# Altium PCB TD.0002-101.PcbDoc
Units mm, origin at the board's own origin, x right, y up, seen from the top; angles counter-clockwise.
Board outline 50 x 50 mm, 4 copper layers (Top Layer, GND, VCC, Bottom Layer), stack 1.468 mm thick; 57 components, 44 nets, 218 pads, 281 vias.
Unrouted connection lines stored in the file: 37.
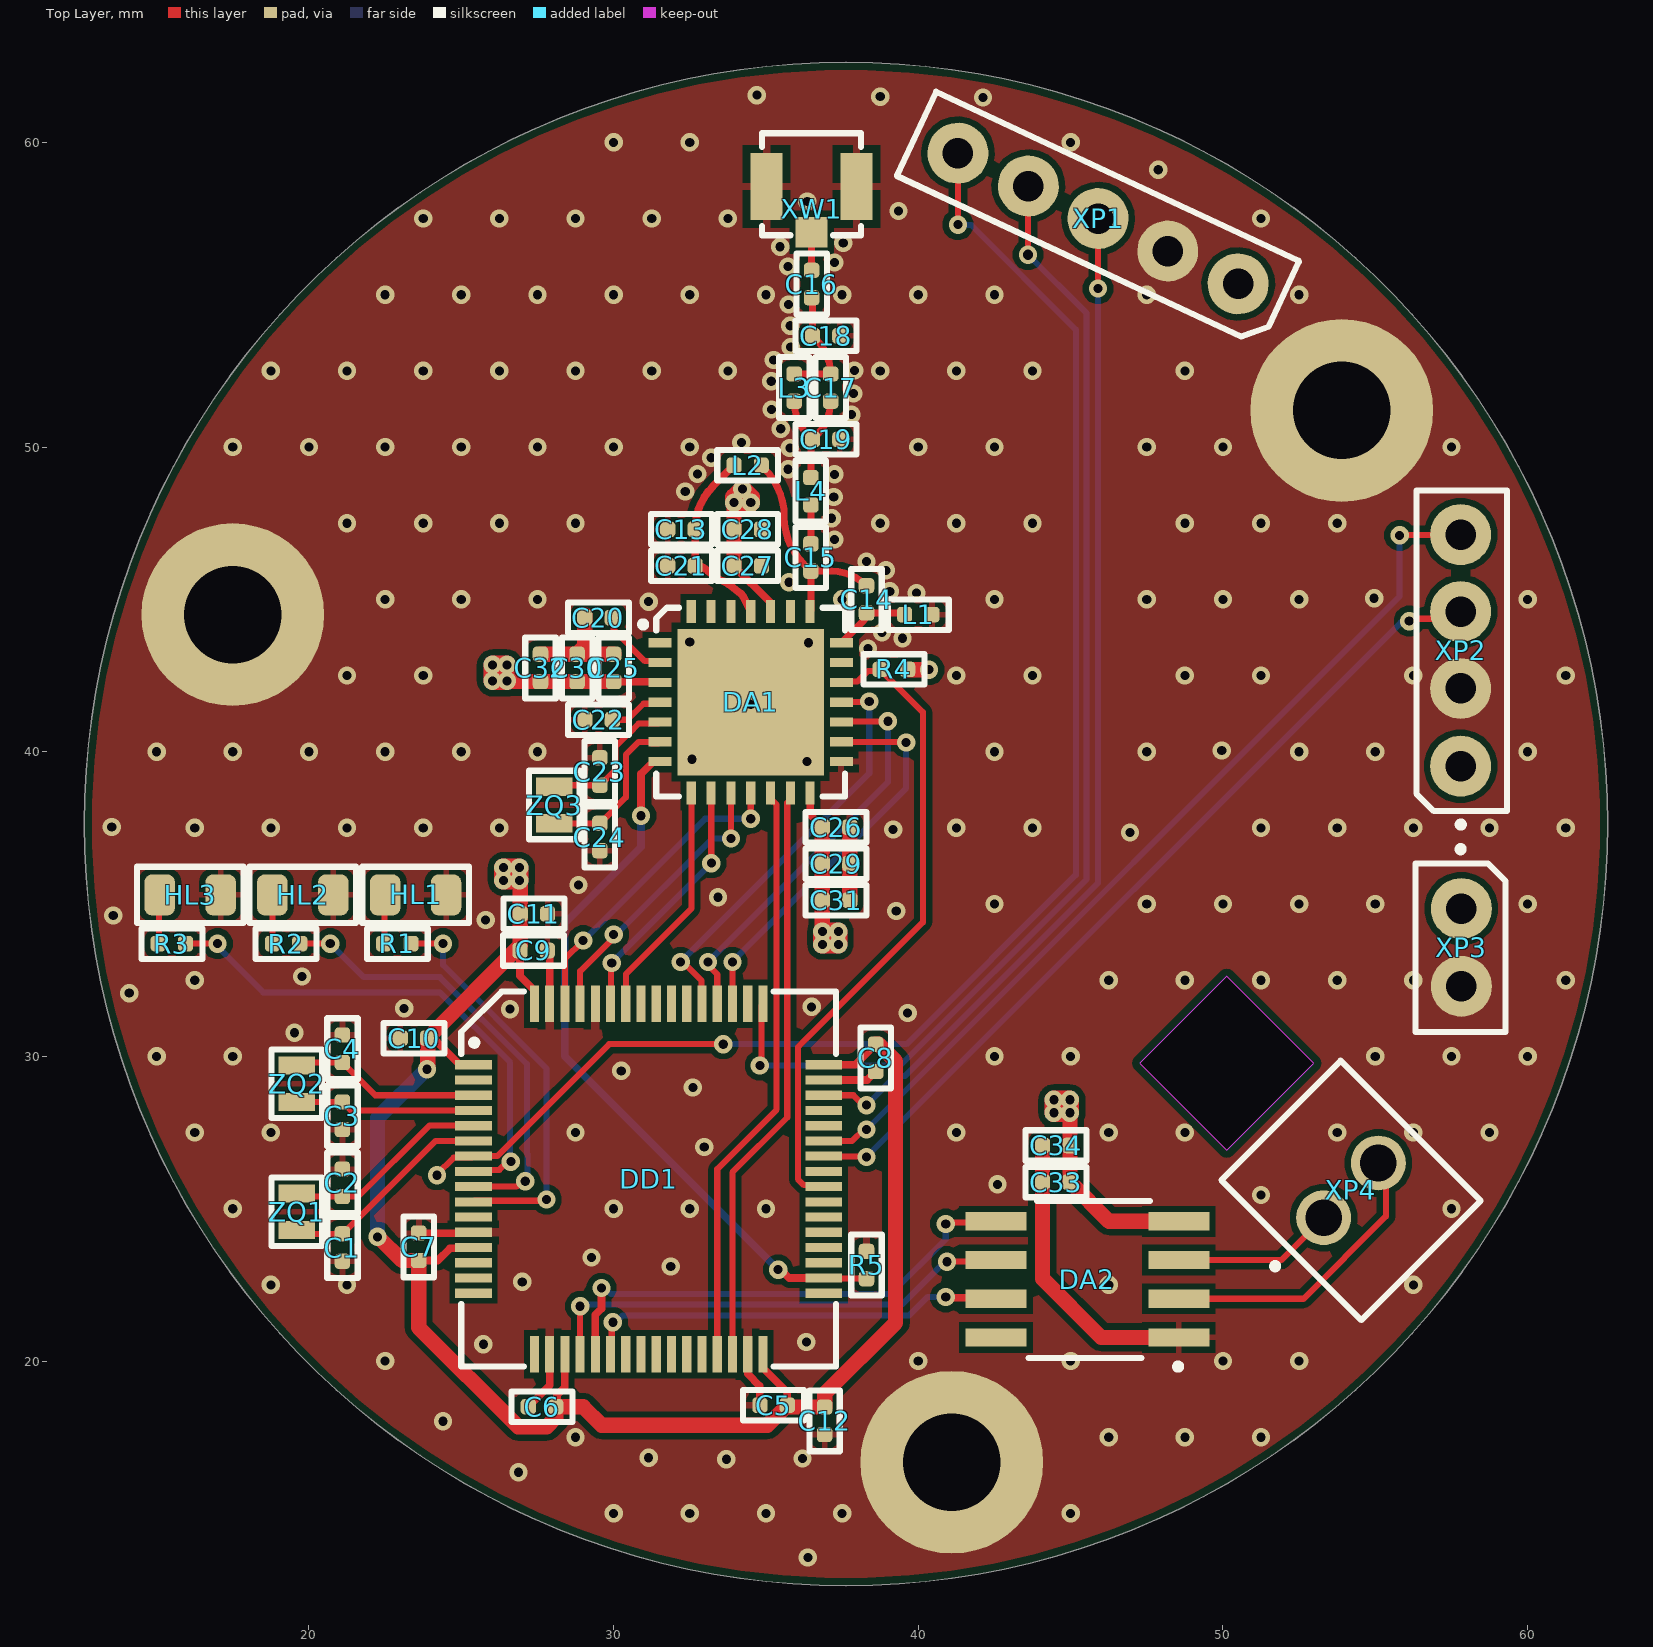
[diagram p0: Top Layer view]
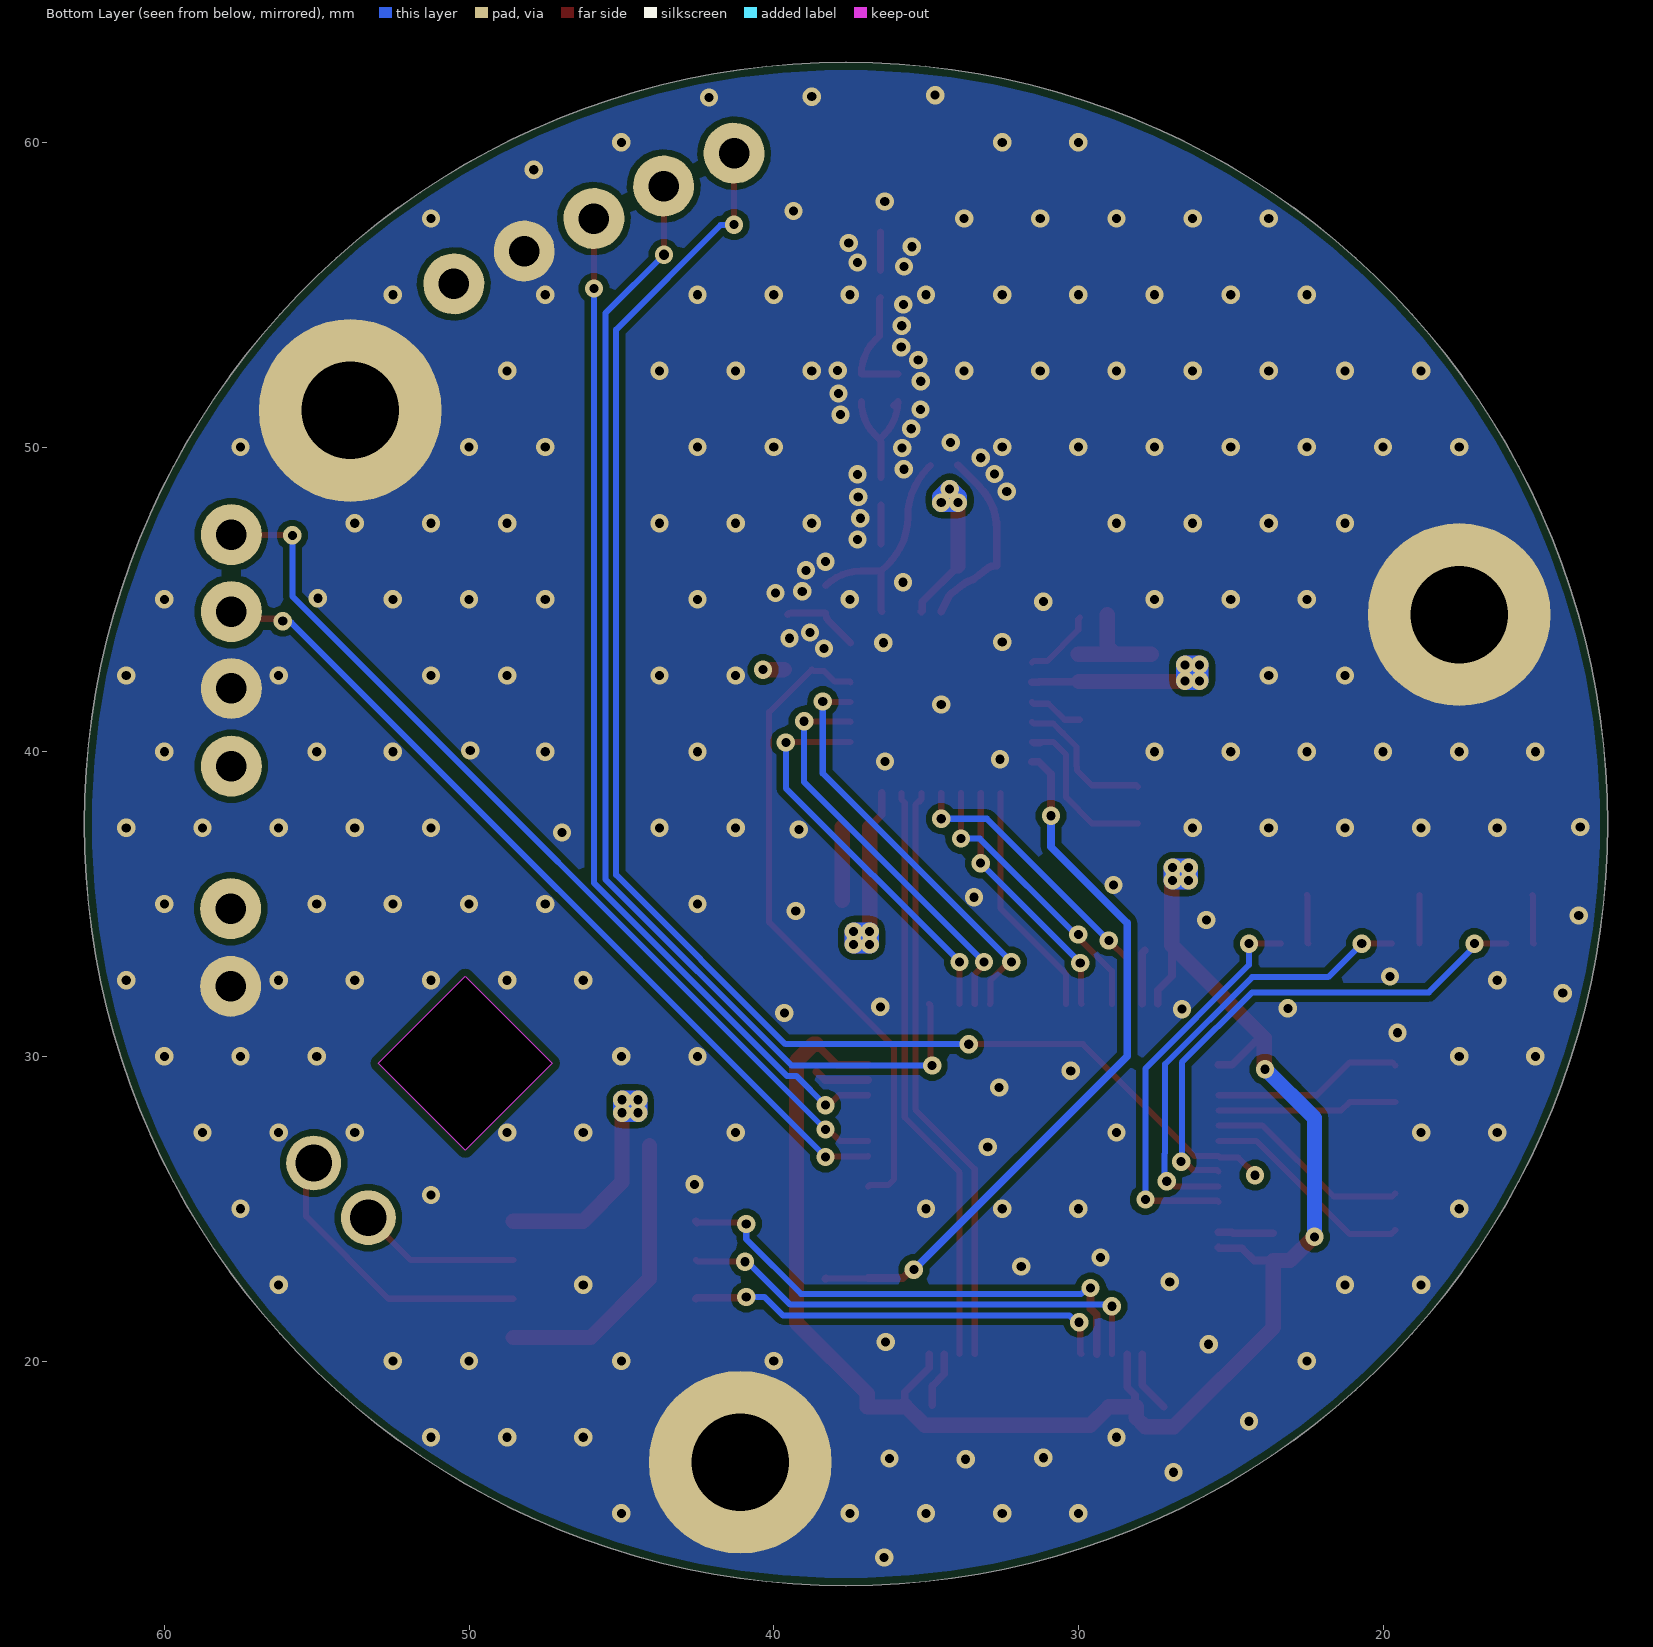
[diagram p1: Bottom Layer view, seen from below]
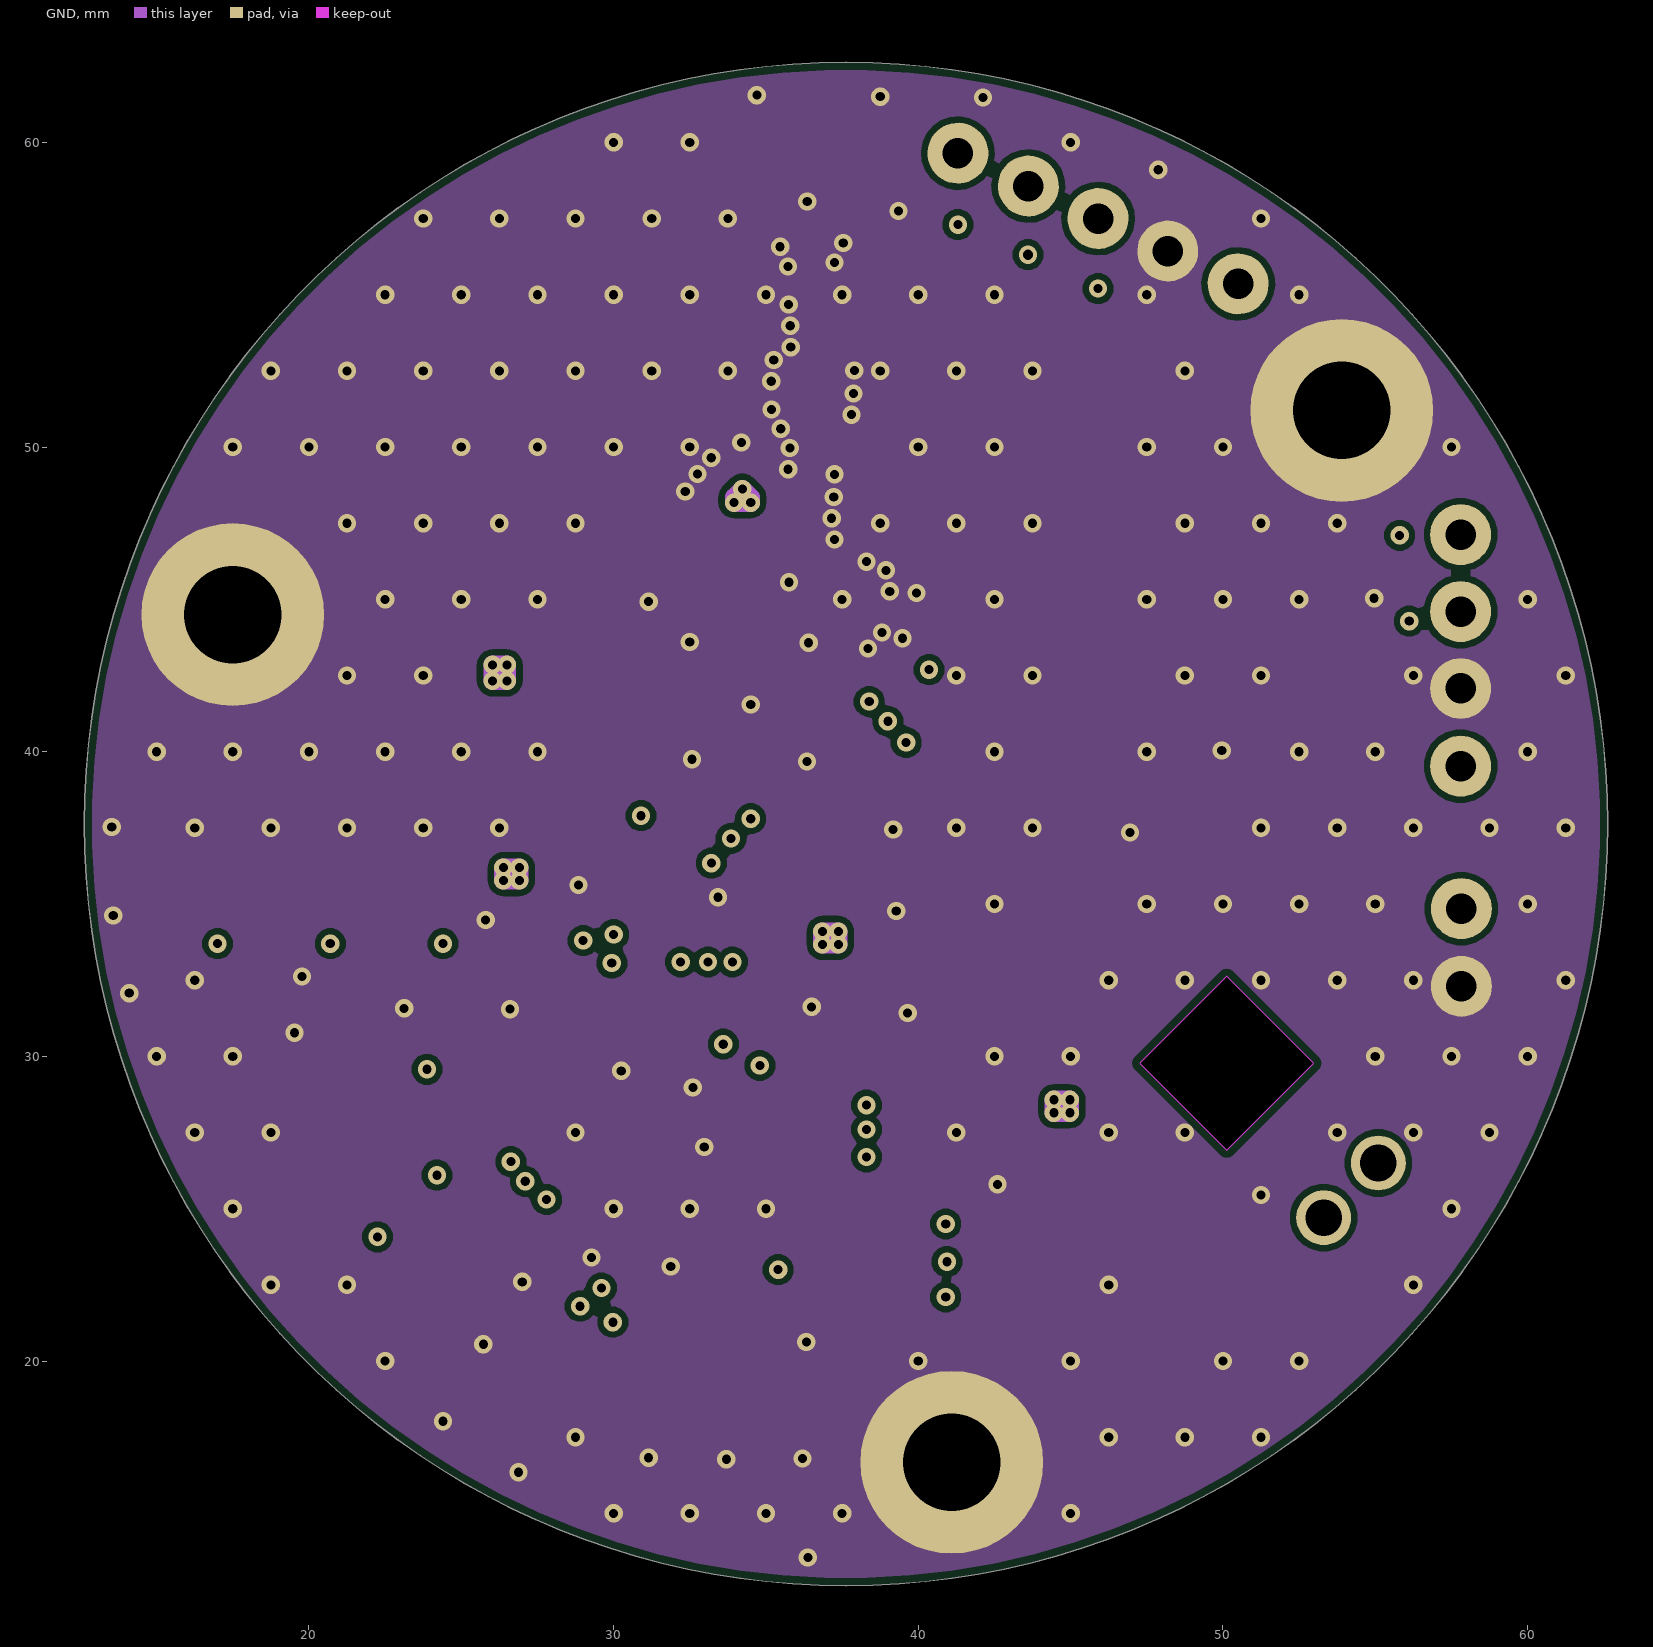
[diagram p2: GND]
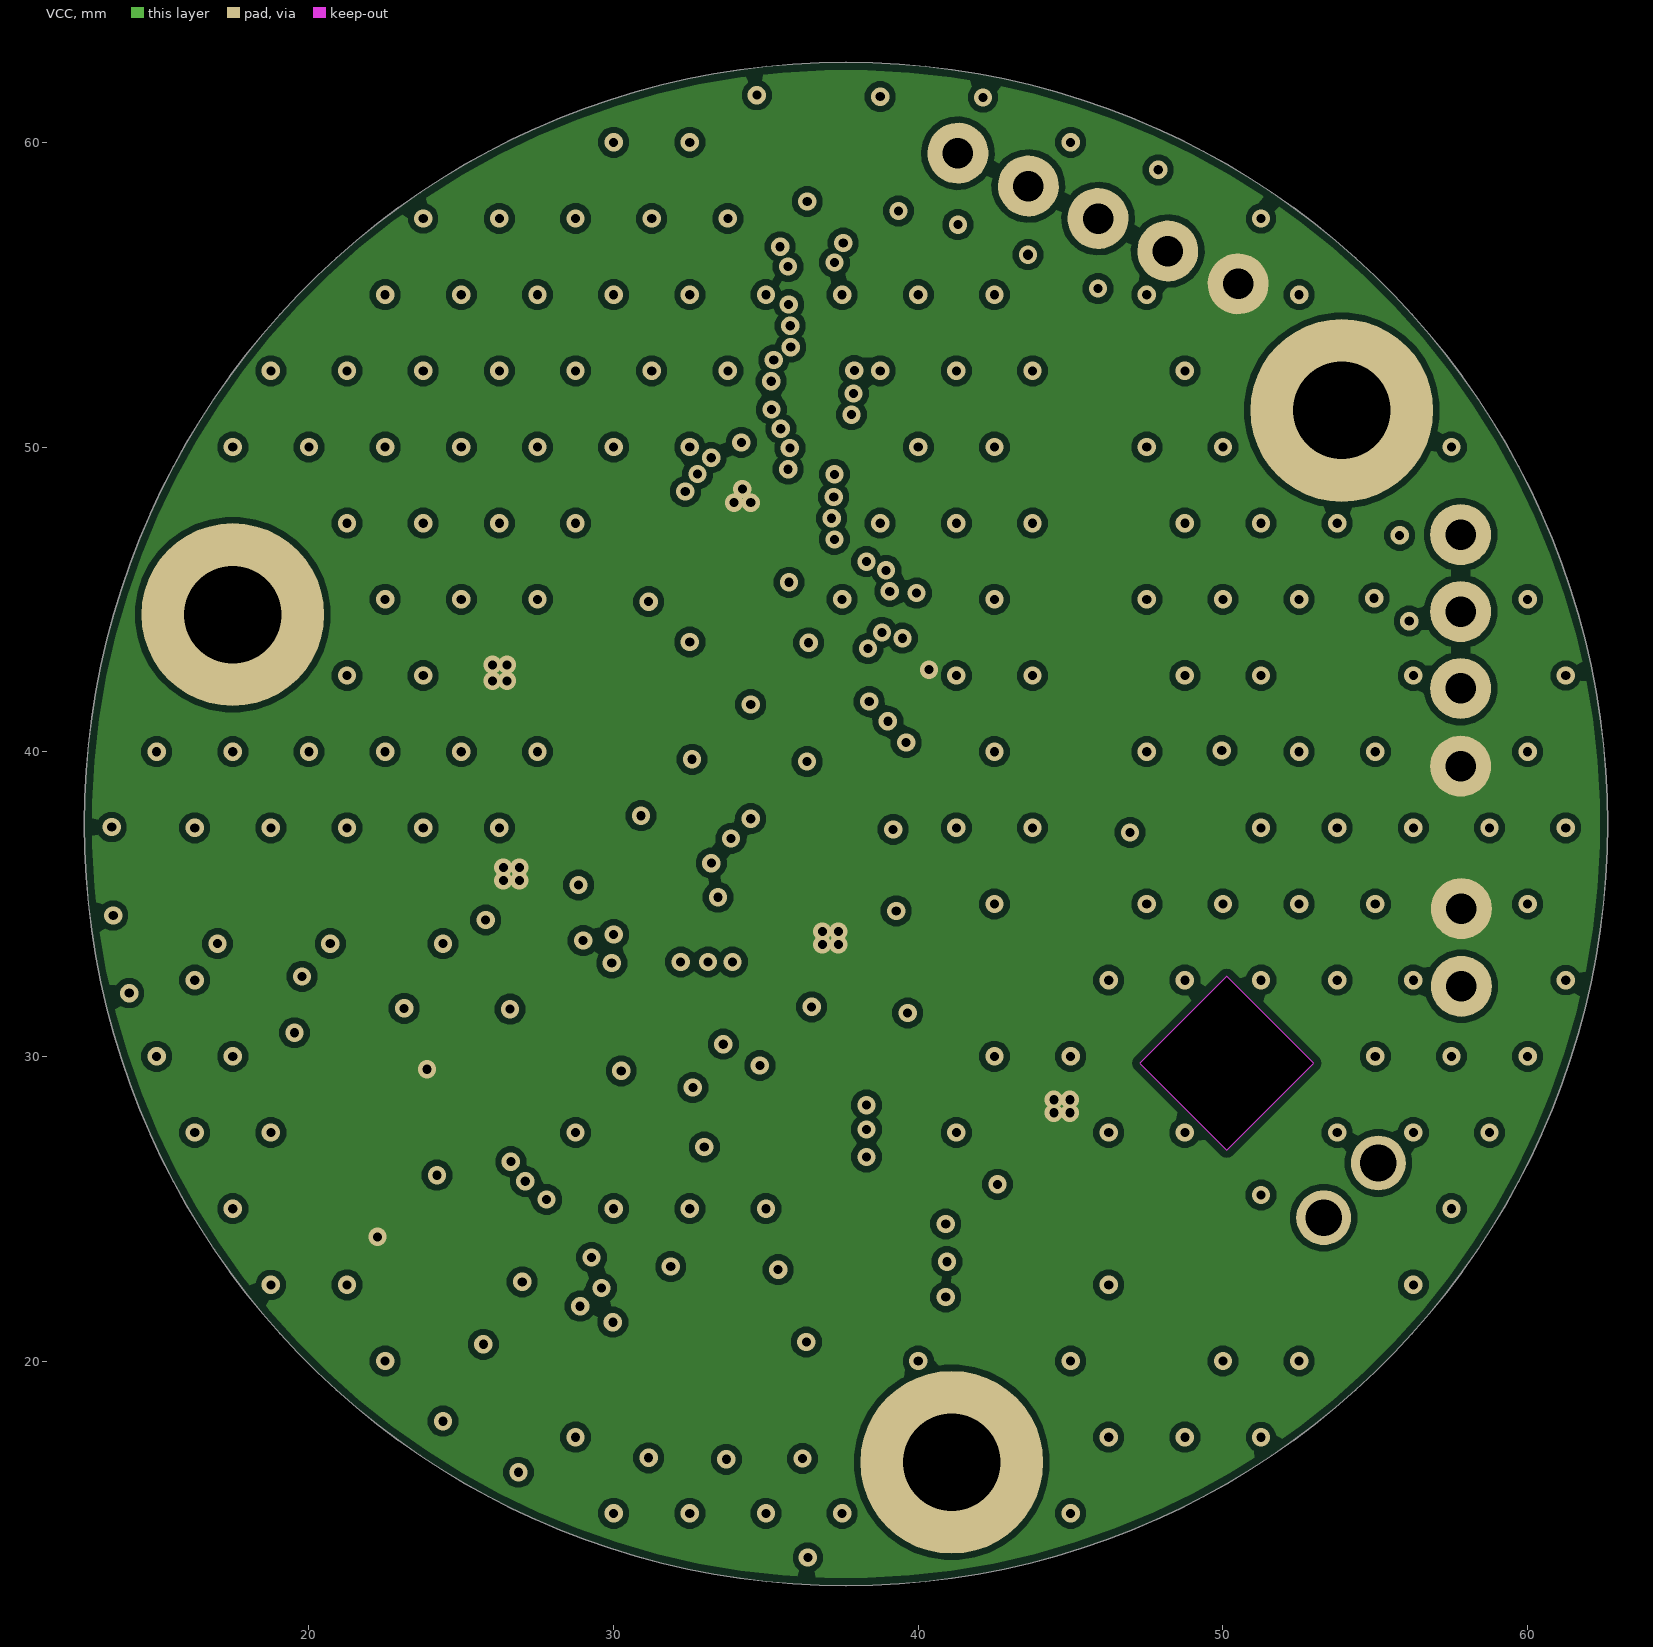
[diagram p3: VCC]
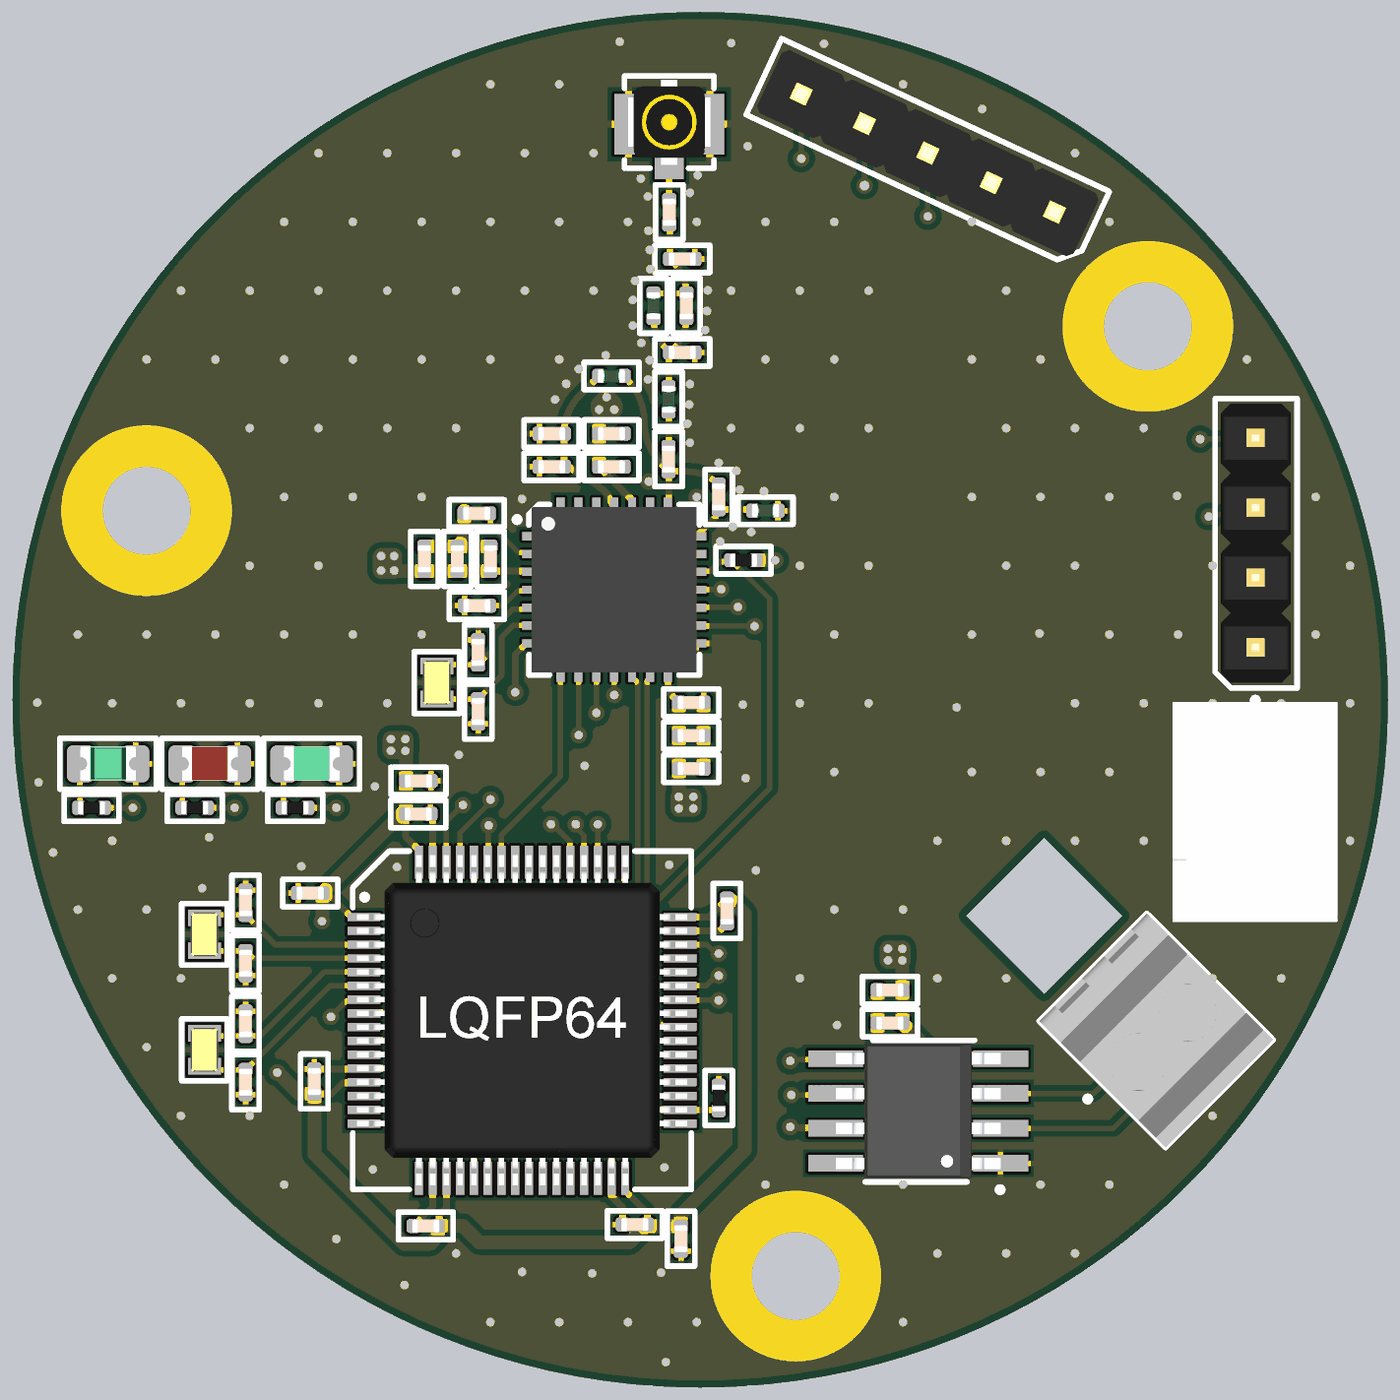
[diagram p4: 3D render of the assembled board from above, using the file's embedded part models]

## Layer stack, top to bottom
Top Solder: solder mask 0.0102, Solder Resist, Dk 3.5
Top Layer: signal copper 0.018
Dielectric 1: prepreg 0.116, TG150, Dk 4.2
GND: signal copper 0.018
Dielectric 2: core 1.164, FR-4, Dk 4.8
VCC: signal copper 0.018
Dielectric 3: prepreg 0.116, TG150, Dk 4.2
Bottom Layer: signal copper 0.018
Bottom Solder: solder mask 0.0102, Solder Resist, Dk 3.5

## Board outline
37.627,12.627 cw(c37.627,37.627) 12.627,37.627 cw(c37.627,37.627) 37.627,62.627 cw(c37.627,37.627) 62.627,37.627 cw(c37.627,37.627)
cut-out: 50.125,26.925 52.975,29.775 50.126,32.624 47.276,29.774

## Design rules (kind name [scope] priority, off if disabled: settings)
BoardOutlineClearance [All] p1: gap=0.254 ignorepadtopadclearanceinfootprint=FALSE except(0: Arc-SplitContinuation Track-SplitContinuation SMDPad-SplitContinuation THPad-SplitContinuation Via-SplitContinuation Fill-SplitContinuation Poly-SplitContinuation Region-SplitContinuation Text-SplitContinuation)
Clearance Clearance_RF [InNetClass('RF')] p1: gap=0.2 ignorepadtopadclearanceinfootprint=FALSE except(0.15: Arc-Arc Arc-Track Arc-SMDPad Arc-THPad Arc-Via Arc-Hole Track-Track Track-SMDPad Track-THPad Track-Via Track-Hole SMDPad-SMDPad SMDPad-THPad SMDPad-Via SMDPad-Hole THPad-THPad THPad-Via THPad-Hole Via-Hole Fill-Hole Poly-Hole Region-Hole Text-Hole)
Clearance [All] p2: gap=0.2 ignorepadtopadclearanceinfootprint=FALSE except(0.15: Arc-Arc Arc-Track Arc-SMDPad Arc-THPad Arc-Via Arc-Hole Track-Track Track-SMDPad Track-THPad Track-Via Track-Hole SMDPad-SMDPad SMDPad-THPad SMDPad-Via SMDPad-Hole THPad-THPad THPad-Via THPad-Hole Via-Hole Fill-Hole Poly-Hole Region-Hole Text-Hole)
HoleSize [All] p1: absolutevalues=TRUE maxlimit=1 minlimit=0.3 maxpercent=80.000 minpercent=20.000
HoleToHoleClearance [All] p1: gap=0.2 allowstackedmicrovias=TRUE
MinimumAnnularRing [All] p1: minimumring=0.15
MinimumSolderMaskSliver [All] p1: minsoldermaskwidth=0.15
PlaneClearance [All] p1: clearance=0.2
PlaneConnect [All] p1: pad.planeconnectstyle=Relief pad.reliefexpansion=0.2 pad.reliefentries=4 pad.reliefconductorwidth=0.2 pad.reliefairgap=0.2 via.planeconnectstyle=Direct via.reliefexpansion=0.2 via.reliefentries=4 via.reliefconductorwidth=0.2 via.reliefairgap=0.2
PolygonConnect PolygonConnect_VCC [IsPad AND (Net = 'VCC3V3')] p1: connectstyle=Direct reliefconductorwidth=0.254 reliefentries=4 polygonreliefangle="90 Angle" airgapwidth=0.254 // For VCC
PolygonConnect PolygonConnect_GND_PTH [InNet('GND') vs IsPad AND HoleSize > 0] p2: connectstyle=Direct reliefconductorwidth=0.254 reliefentries=4 polygonreliefangle="90 Angle" airgapwidth=0.254 // For GND
PolygonConnect PolygonConnect_GND_SMD [InNet('GND') vs IsPad AND HoleSize = 0] p3: connectstyle=Relief reliefconductorwidth=0.2 reliefentries=4 polygonreliefangle="90 Angle" airgapwidth=0.2 // For GND
PolygonConnect [All] p4: thpad.connectstyle=Relief thpad.reliefconductorwidth=0.2 thpad.reliefentries=4 thpad.polygonreliefangle="90 Angle" thpad.airgapwidth=0.2 smdpad.connectstyle=Relief smdpad.reliefconductorwidth=0.2 smdpad.reliefentries=4 smdpad.polygonreliefangle="90 Angle" smdpad.airgapwidth=0.2 via.connectstyle=Direct via.reliefconductorwidth=0.2 via.reliefentries=4 via.polygonreliefangle="90 Angle" via.airgapwidth=0.2 // Number 1
RoutingCorners [All] p1: cornerstyle=45-Degree minsetback=2.5 maxsetback=2.5
RoutingVias [All] p1: holewidth=0.3 width=0.6 viastyle="Through Hole" minholewidth=0.3 minwidth=0.6 maxholewidth=1 maxwidth=1
SilkToSilkClearance [All] p1: silktosilkclearance=0.1
SilkToSolderMaskClearance [IsPad] p1: minsilkscreentomaskgap=0.1 clearancetoexposedcopper=TRUE
SolderMaskExpansion [All] p1: expansion=0.1 istentingtop=FALSE
SupplyNets "Schematic Supply Nets_1" [InNet('GND')] p1: voltage=0.000
SupplyNets "Schematic Supply Nets" [InNet('VCC3V3')] p2: voltage=0.000
Width Width_RF [InNetClass('RF')] p1: maxlimit=0.3 minlimit=0.23 preferedwidth=0.23
Width [All] p2: maxlimit=2 minlimit=0.2 preferedwidth=0.2
22 further rules are at their usual default settings.

## Classes and differential pairs
net class RF: NetC14_1 NetC14_2 NetC15_2 NetC16_1 NetC16_2 NetC17_1 VR_PA
component class TD.0002-100_3: C33 C34 DA2 XP4
component class TD.0002-100_2: C13 C14 C15 C16 C17 C18 C19 C20 C21 C22 C23 C24 C25 C26 C27 C28 C29 C30 C31 C32 DA1 L1 L2 L3 L4 R5 XW1 ZQ3
component class TD.0002-100_1: C1 C2 C3 C4 C5 C6 C7 C8 C9 C10 C11 C12 DD1 HL1 HL2 HL3 R1 R2 R3 XP1 XP2 XP3 ZQ1 ZQ2

## Components (designator, comment, footprint, x,y, rotation, side; value= is the part's Value field where it differs from the comment)
C1 "GCM1555C1H200JA16" C_0402 21.1,23.725 r270 top value="20 пФ"
C2 "GCM1555C1H200JA16" C_0402 21.1,25.85 r90 top value="20 пФ"
C3 "GCM1555C1H4R3BA16" C_0402 21.1,28.05 r270 top value="4,3 пФ"
C4 "GCM1555C1H4R3BA16" C_0402 21.1,30.25 r90 top value="4,3 пФ"
C5 "GRM155R71H104KE14" C_0402 35.25,18.55 r180 top value="0,1 мкФ"
C6 "GRM155R71H104KE14" C_0402 27.65,18.5 r180 top value="0,1 мкФ"
C7 "GRM155R71H104KE14" C_0402 23.6,23.75 r90 top value="0,1 мкФ"
C8 "GRM155R71H104KE14" C_0402 38.6,29.95 r270 top value="0,1 мкФ"
C9 "GRM155R71H104KE14" C_0402 27.375,33.475 r0 top value="0,1 мкФ"
C10 "GRM155R71H104KE14" C_0402 23.45,30.6 r180 top value="0,1 мкФ"
C11 "GRM155C81A225ME44" C_0402 27.383,34.676 r0 top value="2,2 мкФ"
C12 "GRM155C81A225ME44" C_0402 36.923,18.038 r270 top value="2,2 мкФ"
C13 "GRM1555C1H470GA01" C_0402 32.225,47.3 r180 top value="47 пФ"
C14 "GRM1555C1H2R2CA01" C_0402 38.3,45 r90 top value="2,2 пФ"
C15 "GRM1555C1H330GA01" C_0402 36.475,46.375 r90 top value="33 пФ"
C16 "GRM1555C1H470GA01" C_0402 36.5,55.35 r90 top value="47 пФ"
C17 "GRM1555C1H1R2CA01" C_0402 37.125,51.95 r90 top value="1,2 пФ"
C18 "GRM1555C1H1R8CA01" C_0402 36.975,53.65 r0 top value="1,8 пФ"
C19 "GRM1555C1H4R7CA01" C_0402 36.975,50.25 r0 top value="4,7 пФ"
C20 "GRM155R71H104KE14" C_0402 29.5,44.4 r0 top value="0,1 мкФ"
C21 "GRM155R71H103KA88" C_0402 32.225,46.1 r0 top value="0,01 мкФ"
C22 "GRM155R71H104KE14" C_0402 29.506,41.049 r0 top value="0,1 мкФ"
C23 "GRM1555C1H8R2WA01" C_0402 29.55,39.35 r90 top value="8,2 пФ"
C24 "GRM1555C1H8R2WA01" C_0402 29.55,37.2 r270 top value="8,2 пФ"
C25 "GRM155R71H104KE14" C_0402 30,42.75 r90 top value="0,1 мкФ"
C26 "GRM155R71H104KE14" C_0402 37.3,37.525 r0 top value="0,1 мкФ"
C27 "GRM155R71H104KE14" C_0402 34.4,46.1 r0 top value="0,1 мкФ"
C28 "GRM155R71H104KE14" C_0402 34.4,47.3 r0 top value="0,1 мкФ"
C29 "GRM155R71H104KE14" C_0402 37.3,36.325 r0 top value="0,1 мкФ"
C30 "GRM155R71H104KE14" C_0402 28.8,42.75 r90 top value="0,1 мкФ"
C31 "GRM155C81A225ME44" C_0402 37.3,35.125 r0 top value="2,2 мкФ"
C32 "GRM155C81A225ME44" C_0402 27.6,42.75 r90 top value="2,2 мкФ"
C33 "GRM155R61C104KA88" C_0402 44.525,25.875 r180 top value="0,1 мкФ"
C34 "GRM155R61C225KE11" C_0402 44.525,27.075 r180 top value="2,2 мкФ"
DA1 "SX1276IMLTRT" QFN_28 34.5,41.625 r0 top
DA2 "MAX6675" SOIC-8 45.55,22.675 r180 top
DD1 "STM32L476RGT3" LQFP_64 31.15,25.975 r0 top
HL1 "TO-2013BC-BF" LED_0805_BLUE 23.5,35.3 r0 top value="20 мА"
HL2 "TO-2013BC-MRE" LED_0805_RED 19.8,35.3 r0 top value="20 мА"
HL3 "TO-2013BC-PG" LED_0805_GREEN 16.1,35.3 r0 top value="20 мА"
L1 "LQW15AN6N8G80" L_0402 40,44.5 r180 top value="6,8 нГн"
L2 "LQW15AN33NJ00" L_0402 34.4,49.4 r0 top value="33 нГн"
L3 "LQW15AN6N2G8Z" L_0402 35.925,51.95 r90 top value="6,2 нГн"
L4 "LQW15AN10NG80" L_0402 36.475,48.55 r90 top value="10 нГн"
R1 "RC0100FR-07300RP" R_0402 22.9,33.7 r0 top value="300 Ом"
R2 "RC0100FR-07300RP" R_0402 19.25,33.7 r0 top value="300 Ом"
R3 "RC0100FR-07300RP" R_0402 15.5,33.7 r0 top value="300 Ом"
R4 "RC0402FR-07100KL" R_0402 39.2,42.7 r0 top value="100 кОм"
R5 "RC0402FR-07100KL" R_0402 38.3,23.15 r270 top value="100 кОм"
XP1 "PLS-5PIN" PLS-5PIN 45.9,57.5 r155 top
XP2 "PLS-4PIN" PLS-4PIN 57.8,43.325 r90 top
XP3 "XH-2PIN" XH-2PIN 57.825,33.575 r270 top
XP4 "DG308-2.54-02P-14-00AH" Terminal_Block_2PIN 54.202,25.602 r45 top
XW1 "U.FL-R-SMT" U.FL-R-SMT 36.5,57.8 r0 top
ZQ1 "Quartz" CM9V-T1A 19.6,24.9 r270 top value="8 МГц"
ZQ2 "Quartz" CM9V-T1A 19.6,29.1 r90 top value="32 МГц"
ZQ3 "Quartz" CM9V-T1A 28.05,38.25 r270 top value="32 МГц"

## Footprints (in the part's own frame and the unit in brackets; to place one, negate y for a bottom-side part, rotate by r counter-clockwise, add the part's x,y. Pads: shape width x height; smd on the part's side, far side on the other; paste and mask are expansions set on the pad)
C_0402 [mm]
  rrect50% 0.5x0.51 smd: 1(-0.45,0) 2(0.45,0)
  silkscreen extent -1,-0.5 1,0.5, body extent -0.51,-0.25 0.51,0.25, height 0.51
CM9V-T1A [mm]
  rect 0.6x1.2 smd: 1(-0.6,0) 2(0.6,0)
  silkscreen extent -1.12,-0.82 1.12,0.82, body extent -0.8,-0.5 0.8,0.5, height 0.5
L_0402 [mm]
  rrect50% 0.5x0.51 smd: 1(-0.45,0) 2(0.45,0)
  silkscreen extent -1,-0.5 1,0.5, body extent -0.51,-0.26 0.51,0.25, height 0.5
LED_0805_BLUE [mm]
  rrect50% 1x1.35 smd: 1(-1,0) 2(1,0)
  silkscreen extent -1.75,-0.92 1.75,0.92, body extent -1.01,-0.63 1.01,0.63, height 0.8
LED_0805_GREEN [mm]
  rrect50% 1x1.35 smd: 1(-1,0) 2(1,0)
  silkscreen extent -1.75,-0.92 1.75,0.92, body extent -1.01,-0.63 1.01,0.63, height 0.8
LED_0805_RED [mm]
  rrect50% 1x1.35 smd: 1(-1,0) 2(1,0)
  silkscreen extent -1.75,-0.92 1.75,0.92, body extent -1.01,-0.63 1.01,0.63, height 0.8
LQFP_64 [mm]
  rect 1.2x0.3 smd: 1(-5.75,3.75) 2(-5.75,3.25) 3(-5.75,2.75) 4(-5.75,2.25) 5(-5.75,1.75) 6(-5.75,1.25) 7(-5.75,0.75) 8(-5.75,0.25) 9(-5.75,-0.25) 10(-5.75,-0.75) 11(-5.75,-1.25) 12(-5.75,-1.75) 13(-5.75,-2.25) 14(-5.75,-2.75) 15(-5.75,-3.25) 16(-5.75,-3.75) 33(5.75,-3.75) 34(5.75,-3.25) 35(5.75,-2.75) 36(5.75,-2.25) 37(5.75,-1.75) 38(5.75,-1.25) 39(5.75,-0.75) 40(5.75,-0.25) 41(5.75,0.25) 42(5.75,0.75) 43(5.75,1.25) 44(5.75,1.75) 45(5.75,2.25) 46(5.75,2.75) 47(5.75,3.25) 48(5.75,3.75)
  rect 0.3x1.2 smd: 17(-3.75,-5.75) 18(-3.25,-5.75) 19(-2.75,-5.75) 20(-2.25,-5.75) 21(-1.75,-5.75) 22(-1.25,-5.75) 23(-0.75,-5.75) 24(-0.25,-5.75) 25(0.25,-5.75) 26(0.75,-5.75) 27(1.25,-5.75) 28(1.75,-5.75) 29(2.25,-5.75) 30(2.75,-5.75) 31(3.25,-5.75) 32(3.75,-5.75) 49(3.75,5.75) 50(3.25,5.75) 51(2.75,5.75) 52(2.25,5.75) 53(1.75,5.75) 54(1.25,5.75) 55(0.75,5.75) 56(0.25,5.75) 57(-0.25,5.75) 58(-0.75,5.75) 59(-1.25,5.75) 60(-1.75,5.75) 61(-2.25,5.75) 62(-2.75,5.75) 63(-3.25,5.75) 64(-3.75,5.75)
  silkscreen extent -6.15,-6.15 6.15,6.15, body extent -6,-6 6,6
PLS-4PIN [mm]
  round 2 hole 1: 1(-3.8,0) 2(-1.25,0) 3(1.275,0) 4(3.8,0)
  silkscreen extent -5.27,-1.53 5.25,1.45, body extent -5.09,-1.3 5.07,1.24, height 9.2
PLS-5PIN [mm]
  round 2 hole 1: 1(-5.075,0) 2(-2.525,0) 3(0,0) 4(2.525,0) 5(5.075,0)
  silkscreen extent -6.57,-1.53 6.58,1.53, body extent -6.35,-1.27 6.35,1.27, height 8.54
QFN_28 [mm] "6.0 x 6.0 x 0.9 mm 28-lead QFN"
  rect 0.75x0.3 smd: 1(-2.975,1.95) 2(-2.975,1.3) 3(-2.975,0.65) 4(-2.975,0) 5(-2.975,-0.65) 6(-2.975,-1.3) 7(-2.975,-1.95) 15(2.975,-1.95) 16(2.975,-1.3) 17(2.975,-0.65) 18(2.975,0) 19(2.975,0.65) 20(2.975,1.3) 21(2.975,1.95)
  rect 0.3x0.75 smd: 8(-1.95,-2.975) 9(-1.3,-2.975) 10(-0.65,-2.975) 11(0,-2.975) 12(0.65,-2.975) 13(1.3,-2.975) 14(1.95,-2.975) 22(1.95,2.975) 23(1.3,2.975) 24(0.65,2.975) 25(0,2.975) 26(-0.65,2.975) 27(-1.3,2.975) 28(-1.95,2.975)
  rect 4.8x4.8 smd paste-3: EP(0,0)
  silkscreen extent -3.1,-3.1 3.1,3.1, body extent -3.01,-3.01 3.01,3.01, height 0.9
R_0402 [mm]
  rrect50% 0.5x0.51 smd: 1(-0.45,0) 2(0.45,0)
  silkscreen extent -1,-0.5 1,0.5, body extent -0.5,-0.25 0.5,0.25, height 0.47
SOIC-8 [mm]
  rect 2x0.6 smd: 1(-3,1.9) 2(-3,0.63) 3(-3,-0.64) 4(-3,-1.91) 5(3,-1.91) 6(3,-0.64) 7(3,0.63) 8(3,1.9)
  silkscreen extent -2.05,-2.58 1.92,2.58, body extent -3,-2.45 3,2.45, height 1.75
Terminal_Block_2PIN [mm]
  round 1.8 hole 1.2: 1(-1.27,0) 2(1.27,0)
  silkscreen extent -3.62,-3.25 2.77,3.25, body extent -2.77,-3.25 2.77,3.25, height 9.5
U.FL-R-SMT [mm]
  rect 1.05x1 smd: 1(0,-0.75)
  rect 1.05x2.2 smd: 2(-1.475,0.75) 2(1.475,0.75)
  silkscreen extent -1.63,-0.85 1.63,2.5, body extent -1.5,-0.73 1.5,2.37, height 1.29
XH-2PIN [mm]
  round 2 hole 1: 1(-1.275,0) 2(1.275,0)
  silkscreen extent -2.75,-1.5 2.77,1.45, body extent -3.97,-3.03 4.03,2.98, height 7

## Part data
C1 C2: "Chip Multilayer Ceramic Capacitor", Manufacturer=Murata, Operating temperature="-55 … 125 °C", Package="SMD 0402", Tolerance=±5%, Voltage="50 В", Part Number=GCM1555C1H200JA16, TC=C0G, Type="Конденсатор керамический"
C3 C4: "Chip Multilayer Ceramic Capacitor", Manufacturer=Murata, Operating temperature="-55 … 125 °C", Package="SMD 0402", Tolerance="±0,1 пФ", Voltage="50 В", Part Number=GCM1555C1H4R3BA16, TC=C0G, Type="Конденсатор керамический"
C5 C6 C7 C8 C9 C10 C20 C21 C22 C25 C26 C27 C28 C29 C30: "Chip Multilayer Ceramic Capacitor", Manufacturer=Murata, Operating temperature="-55 … 125 °C", Package="SMD 0402", Tolerance=±10%, Voltage="50 В", TC=X7R, Type="Конденсатор керамический"
  C5 C6 C7 C8 C9 C10 C20 C22 C25 C26 C27 C28 C29 C30: Part Number=GRM155R71H104KE14
  C21: Part Number=GRM155R71H103KA88
C11 C12 C31 C32: "Chip Multilayer Ceramic Capacitor", Manufacturer=Murata, Operating temperature="-55 … 105 °C", Package="SMD 0402", Tolerance=±20%, Voltage="10 В", Part Number=GRM155C81A225ME44, TC=X6S, Type="Конденсатор керамический"
C13 C15 C16: "Chip Multilayer Ceramic Capacitor", Manufacturer=Murata, Operating temperature="-55 … 125 °C", Package="SMD 0402", Tolerance=±2%, Voltage="50 В", TC=C0G, Type="Конденсатор керамический"
  C13 C16: Part Number=GRM1555C1H470GA01
  C15: Part Number=GRM1555C1H330GA01
C14 C17 C18 C19: "Chip Multilayer Ceramic Capacitor", Manufacturer=Murata, Operating temperature="-55 … 125 °C", Package="SMD 0402", Tolerance="±0,25 пФ", Voltage="50 В", TC=C0G, Type="Конденсатор керамический"
  C14: Part Number=GRM1555C1H2R2CA01
  C17: Part Number=GRM1555C1H1R2CA01
  C18: Part Number=GRM1555C1H1R8CA01
  C19: Part Number=GRM1555C1H4R7CA01
C23 C24: "Chip Multilayer Ceramic Capacitor", Manufacturer=Murata, Operating temperature="-55 … 125 °C", Package="SMD 0402", Tolerance="±0,05 пФ", Voltage="50 В", Part Number=GRM1555C1H8R2WA01, TC=C0G, Type="Конденсатор керамический"
C33 C34: "Chip Multilayer Ceramic Capacitor", Manufacturer=Murata, Operating temperature="-55 … 85 °C", Package="SMD 0402", Tolerance=±10%, Voltage="16 В", TC=X5R, Type="Конденсатор керамический"
  C33: Part Number=GRM155R61C104KA88
  C34: Part Number=GRM155R61C225KE11
DA1: "860 MHz to 1020 MHz Low Power Long Range Transceiver", Frequency range="137 ... 1020 MHz", Manufacturer=Semtech, Supply voltage="1,8 ... 3,7 В", Temperature range="-40 ... +85 °C", Baudrate="1,7 ... 300 кбит/с", Interface=SPI, Modulation=GFSK/FSK/GMSK/MSK/OOK/LoRa, Type="Transceiver RF"
DA2: Manufacturer="Maxim Integrated", Operating temperature range="-20 ... +85 ºC", SO Current="50 mA", Supply voltage="-0,3 ... 6 V", Measuring range="0 ... +600/(+1024) ºC", Type="Thermocouple to Digital Converter"
DD1: Manufacturer=STMicroelectronics, Supply voltage="1,71 ... 3,6 V", Temperature range="-40 ... +125 ºC", Cystal oscillator="4 ... 48 MHz", Flash memory="1 MB", SRAM="1 KB", Type=Microcontroller
HL1: "Светодиод синий", Color=Синий, Manufacturer=OASISTEK, Package="SMD 0805", Part Number=TO-2013BC-BF, Type=SMD, Wavelength="468 нм"
HL2: "Светодиод красный", Color=Красный, Manufacturer=OASISTEK, Package="SMD 0805", Part Number=TO-2013BC-MRE, Type=SMD, Wavelength="630 нм"
HL3: "Светодиод зеленый", Color=Зеленый, Manufacturer=OASISTEK, Package="SMD 0805", Part Number=TO-2013BC-PG, Type=SMD, Wavelength="525 нм"
L1: Current="1450 мА", Manufacturer=Murata, Operating temperature="-55 … 125 °C", Package="SMD 0402", Tolerance=±2%, Part Number=LQW15AN6N8G80, Type="Катушки постоянной индуктивности"
L2: Current="260 мА", Manufacturer=Murata, Operating temperature="-55 … 125 °C", Package="SMD 0402", Tolerance=±5%, Part Number=LQW15AN33NJ00, Type="Катушки постоянной индуктивности"
L3: Current="1600 мА", Manufacturer=Murata, Operating temperature="-55 … 125 °C", Package="SMD 0402", Tolerance=±2%, Part Number=LQW15AN6N2G8Z, Type="Катушки постоянной индуктивности"
L4: Current="1400 мА", Manufacturer=Murata, Operating temperature="-55 … 125 °C", Package="SMD 0402", Tolerance=±2%, Part Number=LQW15AN10NG80, Type="Катушки постоянной индуктивности"
R1 R2 R3: "General Purpose", Manufacturer=Yageo, Operating temperature="-55 … 125 °C", Package="SMD 0402", Voltage="15 В", Accuracy=±1%, Part Number=RC0100FR-07300RP, Type=Толстопленочный
R4 R5: "High Reliability", Manufacturer=Yageo, Operating temperature="-55 … 155 °C", Package="SMD 0402", Voltage="50 В", Accuracy=±1%, Part Number=RC0402FR-07100KL, Type=Толстопленочный
XP3: Current="3 A", Manufaturer=JST, Voltage="250 V", Contact step="2,54 mm", Type=Connector
XP4: Current="8 A", Manufacturer=Dinkle, Operating temperature="-30 … 120 ºC", Voltage="250 V", Contact step="2.54 mm", Type="Terminal Block"
XW1: Manufacturer="Hirose Electric", Maximum frequency="6 GHz", Operating temperature range="-40 ... +90 ºC", Wave resistance="50 Ohm", Type=Connector
XP1 XP2: Contact step="2,54 mm"

## Free pads (board coordinates)
  round 6 hole 3.2: 1(53.9,51.2) 2(17.5,44.5) 3(41.1,16.675)

## Via types
v1: diameter 0.6, hole 0.3, Top Layer to Bottom Layer, tented both sides, 280 vias
v2: diameter 0.6, hole 0.34, Top Layer to Bottom Layer, tented both sides, 1 vias

## Nets (pads, with @x,y where several pads share a name; then routed paths per layer and width w, separated by ;. In a path a pad name is that pad's centre, name@x,y a point inside that pad or via, vN(x,y) a via of type N, cw(c..) or ccw(c..) an arc to the next point about the centre after c; other vN are vias at no path point)
GND: C1.2 C2.2 C3.2 C4.2 C5.2 C6.2 C7.2 C8.2 C9.2 C10.2 C11.2 C12.2 C13.2 C18.2 C19.2 C20.1 C21.1 C22.1 C23.2 C24.2 C25.2 C26.2 C27.2 C28.2 C29.2 C30.2 C31.2 C32.2 C33.2 C34.2 DA1.15 DA1.23 DA1.26 DA1.EP DA2.1 DD1.12 DD1.18 DD1.31 DD1.47 DD1.60 DD1.63 HL1.2 HL2.2 HL3.2 L1.1 pad.1 pad.2 pad.3 R5.1 XP1.2 XP2.2 XP3.2 XW1.2 | length 25.1
  Top Layer w0.25: C7.2 24.925,24.2 24.95,24.225 DD1.12 ; C6.2 27.2,18.505 27.9,19.205 DD1.18 ; C9.2 27.9,33.4 DD1.63 ; DD1.31 34.4,19.58 34.8,19.18 C5.2 ; DD1.47 38.32,29.225 38.595,29.5 C8.2
  Top Layer w0.5: C32.2 28.795,43.2 29.05,43.455 C20.1 C20.1@29.05,44.497 ; C30.2 C25.2 30.005,43.2 C25.2@30.005,43.205 ; C31.2 C29.2 C26.2 ; C34.2 C33.2 44.075,22.704 46.004,20.775 DA2.1
  other v1: 36.375,13.55 30,15 32.5,15 35,15 37.5,15 45,15 26.875,16.35 33.7,16.775 36.2,16.8 31.15,16.825 28.75,17.5 46.25,17.5 48.75,17.5 51.25,17.5 24.4,18.025 22.5,20 40,20 45,20 50,20 52.5,20 25.725,20.55 36.325,20.625 18.75,22.5 21.25,22.5 46.25,22.5 56.25,22.5 27,22.6 31.875,23.1 29.275,23.4 17.5,25 30,25 32.5,25 35,25 57.5,25 51.25,25.45 42.6,25.8 32.975,27.025 16.25,27.5 18.75,27.5 28.75,27.5 41.25,27.5 46.25,27.5 48.75,27.5 53.75,27.5 56.25,27.5 58.75,27.5 32.6,28.975 30.25,29.525 15,30 17.5,30 42.5,30 45,30 55,30 57.5,30 60,30 19.525,30.775 39.65,31.425 26.6,31.55 23.125,31.575 36.5,31.625 14.1,32.075 16.25,32.5 46.25,32.5 48.75,32.5 51.25,32.5 53.75,32.5 56.25,32.5 61.25,32.5 19.775,32.625 25.8,34.475 13.575,34.625 39.275,34.775 42.5,35 47.5,35 50,35 52.5,35 55,35 60,35 33.425,35.225 28.85,35.625 46.95,37.35 39.175,37.45 16.25,37.5 18.75,37.5 21.25,37.5 23.75,37.5 26.25,37.5 41.25,37.5 43.75,37.5 51.25,37.5 53.75,37.5 56.25,37.5 58.75,37.5 61.25,37.5 13.525,37.525 36.35,39.675 32.575,39.75 15,40 17.5,40 20,40 22.5,40 25,40 27.5,40 42.5,40 47.5,40 52.5,40 55,40 60,40 49.961,40.039 34.5,41.55 21.25,42.5 23.75,42.5 41.25,42.5 43.75,42.5 48.75,42.5 51.25,42.5 56.25,42.5 61.25,42.5 38.352,43.384 36.4,43.575 32.5,43.6 39.48,43.725 38.807,43.916 31.15,44.925 22.5,45 25,45 27.5,45 37.5,45 42.5,45 47.5,45 50,45 52.5,45 60,45 54.961,45.039 39.943,45.206 39.063,45.263 35.757,45.56 38.939,45.952 38.3,46.238 37.247,46.968 21.25,47.5 23.75,47.5 26.25,47.5 28.75,47.5 38.75,47.5 41.25,47.5 43.75,47.5 48.75,47.5 51.25,47.5 53.75,47.5 37.157,47.662 37.223,48.359 32.352,48.541 37.25,49.104 32.756,49.112 35.729,49.27 33.204,49.65 35.785,49.968 17.5,50 20,50 22.5,50 25,50 27.5,50 30,50 32.5,50 40,50 42.5,50 47.5,50 50,50 57.5,50 34.191,50.152 35.487,50.601 37.807,51.062 35.179,51.23 37.873,51.759 35.173,52.161 18.75,52.5 21.25,52.5 23.75,52.5 26.25,52.5 28.75,52.5 31.25,52.5 33.75,52.5 37.9,52.51 38.75,52.5 41.25,52.5 43.75,52.5 48.75,52.5 35.255,52.856 35.813,53.279 35.795,53.979 35.744,54.677 22.5,55 25,55 27.5,55 30,55 32.5,55 35,55 37.5,55 40,55 42.5,55 47.5,55 52.5,55 35.725,55.923 37.249,56.057 35.465,56.573 37.535,56.696 23.75,57.5 26.25,57.5 28.75,57.5 31.25,57.5 33.75,57.5 51.25,57.5 39.35,57.75 36.355,58.06 47.875,59.1 30,60 32.5,60 45,60 42.125,61.475 38.75,61.5 34.7,61.55
NetC1_1: C1.1 DD1.6 ZQ1.2 | length 7.1
  Top Layer w0.2: ZQ1.2 19.725,24.175 C1.1 21.105,24.175 24.155,27.225 DD1.6
NetC2_1: C2.1 DD1.5 ZQ1.1 | length 6.8
  Top Layer w0.2: ZQ1.1 19.7,25.4 21.625,25.4 23.95,27.725 DD1.5
NetC3_1: C3.1 DD1.4 ZQ2.1 | length 5.9
  Top Layer w0.2: ZQ2.1 C3.1 21.375,28.225 DD1.4
NetC4_1: C4.1 DD1.3 ZQ2.2 | length 6.3
  Top Layer w0.2: ZQ2.2 19.7,29.8 C4.1 22.175,28.725 DD1.3
NetC14_1: C14.1 DA1.21 L1.2 | length 2.6
  Top Layer w0.23: DA1.21 38.194,44.294 ccw(c37.938,44.55) C14.1 39.429,44.55 cw(c39.429,44.379) L1.2
NetC14_2: C14.2 C15.1 DA1.22 L2.2 | length 7.2
  Top Layer w0.23: L2.2 34.928,49.322 cw(c33.306,47.7) 35.6,47.7 ccw(c37.773,47.7) 36.236,46.164 C15.1 ; DA1.22 ccw(c36.39,44.66) 36.475,44.66 C15.1 ; C14.2 ccw(c37.153,44.303) 37.153,45.925 C15.1
NetC15_2: C15.2 L4.1 | length 1.3
  Top Layer w0.23: C15.2 L4.1
NetC16_1: C16.1 C17.2 C18.1 L3.2 | length 3.9
  Top Layer w0.23: L3.2 C17.2 ccw(c35.556,52.4) 36.665,53.51 C18.1 36.525,54.84 ccw(c36.44,54.84) C16.1
NetC16_2: C16.2 XW1.1 | length 1.3
  Top Layer w0.23: C16.2 XW1.1
NetC17_1: C17.1 C19.1 L3.1 L4.2 | length 4.3
  Top Layer w0.23: L3.1@36.065,51.36 L3.1 ccw(c37.494,51.5) 36.385,50.39 C19.1 ; L4.2 36.475,50.129 cw(c36.646,50.129) C19.1 ; C17.1 cw(c35.556,51.5) 36.665,50.39 C19.1
NetC20_2: C20.2 DA1.2 | length 2.4
  Top Layer w0.2: C20.2 30.003,44.347 30.003,43.997 31.025,42.975 31.475,42.975 DA1.2
NetC22_2: C22.2 DA1.4 | length 1.8
  Top Layer w0.2: C22.2 30.454,41.049 30.98,41.575 31.475,41.575 DA1.4
NetC23_1: C23.1 DA1.5 ZQ3.1 | length 4.8
  Top Layer w0.2: ZQ3.1 28.1,38.9 C23.1 29.555,38.9 30.05,39.395 30.05,39.515 30.055,39.52 30.055,40.155 30.505,40.605 30.506,40.606 30.825,40.925 31.475,40.925 DA1.5
NetC24_1: C24.1 DA1.6 ZQ3.2 | length 5.6
  Top Layer w0.2: ZQ3.2 C24.1 29.555,37.65 30.405,38.5 30.405,39.905 30.825,40.325 DA1.6 ; DA1.6@31.25,40.275 DA1.6@31.475,40.275
NetDD1_8: DD1.8 R3.2 | length 16.9
  Top Layer w0.2: R3.2 v1(17,33.7) ; DD1.8 25.45,26.275 26.249,26.275 26.519,26.545 v1(26.627,26.545)
  Bottom Layer w0.2: v1(17,33.7) 17,33.6 18.5,32.1 24.3,32.1 26.6,29.8 26.6,26.572 v1(26.627,26.545)
NetDD1_9: DD1.9 R2.2 | length 14.8
  Top Layer w0.2: R2.2 v1(20.7,33.7) ; DD1.9 26.817,25.725 26.992,25.9 v1(27.1,25.9)
  Bottom Layer w0.2: v1(20.7,33.7) 21.8,32.6 24.3,32.6 27.15,29.75 27.15,26.828 27.178,26.8 27.178,26.344 27.177,26.342 27.177,25.977 v1(27.1,25.9)
NetDD1_10: DD1.10 R1.2 | length 13.3
  Top Layer w0.2: R1.2 v1(24.4,33.7) ; DD1.10 25.437,25.263 27.763,25.263 v1(27.8,25.3)
  Bottom Layer w0.2: v1(24.4,33.7) 24.4,33 27.8,29.6 v1(27.8,25.3)
NetHL1_1: HL1.1 R1.1 | length 1.6
  Top Layer w0.2: R1.1 22.475,33.725 22.475,35.275 HL1.1
NetHL2_1: HL2.1 R2.1 | length 1.6
  Top Layer w0.2: R2.1 HL2.1
NetHL3_1: HL3.1 R3.1 | length 1.6
  Top Layer w0.2: R3.1 15.075,33.725 15.075,35.275 HL3.1
NRESET: DD1.7 XP1.5 | length 50.6
  Top Layer w0.2: v1(24.2,26.1) 24.2,26.129 24.746,26.675 25.35,26.675 DD1.7 26.182,26.725 29.857,30.4 v1(33.6,30.4) ; v1(41.3,57.3) XP1.5
  Bottom Layer w0.2: v1(33.6,30.4) 39.615,30.4 45.175,35.96 45.175,53.85 41.737,57.288 41.312,57.288 v1(41.3,57.3)
SPI1_MISO: DA1.17 DD1.52 | length 13.4
  Top Layer w0.2: v1(33.1,33.1) 33.1,32.992 33.4,32.692 DD1.52 ; DA1.17 37.488,40.987 38.987,40.987 v1(39,41)
  Bottom Layer w0.2: v1(33.1,33.1) 39,39 v1(39,41)
SPI1_MOSI: DA1.18 DD1.53 | length 13.7
  Top Layer w0.2: v1(32.2,33.1) 32.27,33.1 32.886,32.485 32.886,31.739 DD1.53 ; DA1.18 37.485,41.635 38.379,41.635 v1(38.389,41.646)
  Bottom Layer w0.2: v1(32.2,33.1) 38.389,39.289 v1(38.389,41.646)
SPI1_NSS: DA1.19 DD1.40 R4.1 | length 21.4
  Top Layer w0.2: DD1.40 36.85,25.775 36.246,25.775 36.05,25.971 36.05,30.3 40.15,34.4 40.15,41.295 38.75,42.695 R4.1 38.697,42.647 38.347,42.647 38,42.3 37.5,42.3 DA1.19
SPI1_SCK: DA1.16 DD1.51 | length 13.1
  Top Layer w0.2: DD1.51 v1(33.9,33.1) ; DA1.16 37.487,40.312 39.588,40.312 v1(39.6,40.3)
  Bottom Layer w0.2: v1(33.9,33.1) 39.6,38.8 v1(39.6,40.3)
SPI2_CS: DA2.6 DD1.20 | length 15.8
  Top Layer w0.2: DD1.20 v1(28.9,21.8) ; v1(40.939,23.261) 42.496,23.261 DA2.6
  Bottom Layer w0.2: v1@28.9,21.825 28.925,21.85 39.45,21.85 40.861,23.261 v1(40.939,23.261)
SPI2_MISO: DA2.7 DD1.22 | length 14
  Top Layer w0.2: DD1.22 29.937,20.262 29.937,21.237 v1(29.975,21.275)
  Top Layer w0.25: v1(40.9,22.1) 40.927,22.073 42.523,22.073 DA2.7
  Bottom Layer w0.2: v1(29.975,21.275) 30.067,21.275 30.292,21.5 39.7,21.5 40.3,22.1 v1(40.9,22.1)
SPI2_SCK: DA2.5 DD1.21 | length 16.6
  Top Layer w0.2: v1@40.943,24.543 DA2.5@42.508,24.543
  Top Layer w0.25: DD1.21 29.4,21.513 29.6,21.713 v1(29.6,22.4) ; v1(40.9,24.5) v1@40.943,24.543 ; DA2.5@42.508,24.543 DA2.5
  Bottom Layer w0.2: v1(29.6,22.4) 29.708,22.4 29.908,22.2 39.1,22.2 40.9,24 v1(40.9,24.5)
SWCLK: DD1.49 XP1.4 | length 38.9
  Top Layer w0.2: v1(34.8,29.7) 34.85,29.75 34.85,31.675 DD1.49 ; v2(43.6,56.315) 43.606,56.321 43.606,58.561 XP1.4
  Bottom Layer w0.2: v1(34.8,29.7) 39.41,29.7 45.525,35.815 45.525,54.39 v2(43.6,56.315)
SWDIO: DD1.46 XP1.3 | length 34
  Top Layer w0.2: DD1.46 37.867,28.725 38.192,28.4 v1(38.3,28.4) ; v1(45.9,55.2) XP1.3
  Bottom Layer w0.2: v1(38.3,28.4) 39.25,29.35 39.555,29.35 45.9,35.695 v1(45.9,55.2)
SX_DIO0: DA1.8 DD1.58 | length 7.8
  Top Layer w0.2: DD1.58 30.4,32.7 32.55,34.85 DA1.8
SX_DIO1: DA1.9 DD1.59 | length 8.3
  Top Layer w0.2: DD1.59 29.919,31.744 29.919,33.042 v1(29.939,33.061) ; DA1.9 33.204,38.646 33.204,36.347 v1(33.208,36.343)
  Bottom Layer w0.2: v1(29.939,33.061) 29.939,33.068 33.208,36.337 v1(33.208,36.343)
SX_DIO2: DA1.10 DD1.61 | length 9.4
  Top Layer w0.2: DD1.61 28.9,32.8 30,33.9 v1(30,34) ; v1(33.85,37.15) DA1.10
  Bottom Layer w0.2: v1(30,34) 30.087,34 33.237,37.15 v1(33.85,37.15)
SX_DIO3: DA1.11 DD1.62 | length 10.3
  Top Layer w0.2: DD1.62 28.4,33.2 v1(29,33.8) ; v1(34.5,37.8) DA1.11
  Bottom Layer w0.2: v1(29,33.8) 33,37.8 v1(34.5,37.8)
SX_DIO4: DA1.12 DD1.29 | length 19.3
  Top Layer w0.2: DD1.29 33.4,26.3 35.35,28.25 35.35,38.258 35.233,38.375 35.2,38.375 35.15,38.425 DA1.12
SX_DIO5: DA1.13 DD1.30 | length 19.2
  Top Layer w0.2: DD1.30 33.9,26.193 35.7,27.993 35.7,38.325 35.8,38.425 DA1.13
SX_NRESET: DA1.7 DD1.34 R5.2 | length 24
  Top Layer w0.2: DD1.34@36.912,22.713 R5.2@38.287,22.713
  Top Layer w0.25: v1(30.9,37.9) 30.9,39.275 31.3,39.675 DA1.7 ; v1(35.4,23) 35.495,23 35.77,22.725 DD1.34 DD1.34@36.912,22.713 ; R5.2@38.287,22.713 R5.2
  Bottom Layer w0.25: v1(30.9,37.9) 30.9,36.876 28.4,34.376 28.4,30 v1(35.4,23)
T+: DA2.3 XP4.1 | length 5.3
  Top Layer w0.2: DA2.3 51.915,23.315 XP4.1
T-: DA2.2 XP4.2 | length 9.8
  Top Layer w0.2: DA2.2 52.647,22.045 55.35,24.748 55.35,26.25 XP4.2
UART1_RX: DD1.43 XP2.4 | length 30.3
  Top Layer w0.2: DD1.43 37.826,27.225 38.201,27.6 v1(38.3,27.6) ; v1(55.8,47.1) 55.812,47.112 57.788,47.112 XP2.4
  Bottom Layer w0.2: v1(38.3,27.6) 55.8,45.1 v1(55.8,47.1)
UART1_TX: DD1.42 XP2.3 | length 28.3
  Top Layer w0.2: DD1.42 36.912,26.713 38.287,26.713 v1(38.3,26.7) ; v1(56.114,44.286) 56.19,44.363 57.563,44.363 XP2.3
  Bottom Layer w0.2: v1(38.3,26.7) 55.823,44.223 55.823,44.237 56.065,44.237 v1(56.114,44.286)
VCC3V3: C5.1 C6.1 C7.1 C8.1 C9.1 C10.1 C11.1 C12.1 C25.1 C26.1 C27.1 C28.1 C29.1 C30.1 C31.1 C32.1 C33.1 C34.1 DA1.3 DA1.14 DA1.24 DA2.4 DD1.1 DD1.13 DD1.19 DD1.32 DD1.48 DD1.64 R4.2 XP1.1 XP2.1 XP3.1 | length 106.9
  Top Layer w0.25: C7.1 24.23,23.3 24.63,23.7 25.375,23.7 DD1.13 ; C10.1@24.025,30.47 24.205,30.47 24.95,29.725 DD1.1 ; C9.1@26.925,33.47 26.925,32.65 27.4,32.175 DD1.64 ; C6.1 28.141,18.541 28.141,18.88 28.4,19.139 DD1.19 ; C25.1 31.275,42.3 31.3,42.275 DA1.3 ; C27.1@33.95,46.095 35.125,44.92 35.125,44.625 DA1.24 ; DD1.32 34.9,19.775 35.7,18.975 C5.1@35.7,18.555 ; DA1.14 36.45,37.925 36.596,37.779 36.601,37.779 36.85,37.53 C26.1 ; DD1.48 37.925,29.725 38.47,30.27 38.47,30.275 C8.1@38.595,30.4
  Top Layer w0.5: v1(22.25,24.075) 22.275,24.075 23.05,23.3 C7.1 23.6,21.103 26.858,17.845 27.807,17.845 28.1,18.138 C6.1 29,18.5 29.605,17.895 35.05,17.895 C5.1@35.7,18.545 ; v1(23.875,29.575) 23.875,29.602 23.9,29.627 C10.1 23.9,30.605 26.933,33.638 C11.1 26.933,35.718 26.906,35.744 v1(26.906,35.771) ; v1(26.5,42.325) 26.527,42.325 26.552,42.3 C32.1 C30.1 C25.1 ; C27.1@33.95,46.095 C27.1 33.95,46.105 C28.1 v1(33.95,48.175) ; C5.1@35.7,18.555 C5.1 C5.1@35.7,18.545 ; v1(36.85,34.1) C31.1 C29.1 C26.1 ; C8.1@38.595,30.4 C8.1 38.697,30.4 39.255,29.842 39.255,21.255 36.928,18.928 36.928,18.488 C12.1 35.757,18.488 C5.1@35.7,18.545 ; R4.2 39.65,42.695 39.696,42.695 39.697,42.693 v1(40.354,42.693) ; v1(44.975,28.15) C34.1 C33.1 44.975,25.87 46.26,24.585 DA2.4
  Top Layer w0.6: v1(26.025,42.325) v1(26.025,42.85) v1(26.5,42.85) v1(26.5,42.325) v1(26.025,42.325) ; v1(26.381,35.771) v1(26.381,36.196) v1(26.906,36.196) v1(26.906,35.771) v1(26.381,35.771) ; v1(33.95,48.175) v1(34.5,48.175) 34.5,48.35 v1(34.225,48.625) 33.95,48.35 v1(33.95,48.175) ; v1(36.85,33.675) v1(36.85,34.1) v1(37.375,34.1) v1(37.375,33.675) v1(36.85,33.675) ; v1(44.45,28.15) v1(44.975,28.15) v1(44.975,28.575) v1(44.45,28.575) v1(44.45,28.15)
  GND w0.6: v1(26.025,42.325) v1(26.5,42.325) v1(26.5,42.85) v1(26.025,42.85) v1(26.025,42.325) ; v1(26.381,35.771) v1(26.906,35.771) v1(26.906,36.196) v1(26.381,36.196) v1(26.381,35.771) ; v1(33.95,48.175) v1(34.5,48.175) 34.5,48.35 v1(34.225,48.625) 33.95,48.35 v1(33.95,48.175) ; v1(36.85,33.675) v1(36.85,34.1) v1(37.375,34.1) v1(37.375,33.675) v1(36.85,33.675) ; v1(44.45,28.15) v1(44.975,28.15) v1(44.975,28.575) v1(44.45,28.575) v1(44.45,28.15)
  Bottom Layer w0.5: v1(22.25,24.075) 22.25,27.975 23.85,29.575 v1(23.875,29.575)
  Bottom Layer w0.6: v1(26.025,42.325) v1(26.5,42.325) v1(26.5,42.85) v1(26.025,42.85) v1(26.025,42.325) ; v1(26.381,35.771) v1(26.381,36.196) v1(26.906,36.196) v1(26.906,35.771) v1(26.381,35.771) ; v1(33.95,48.175) v1(34.5,48.175) 34.5,48.35 v1(34.225,48.625) 33.95,48.35 v1(33.95,48.175) ; v1(36.85,33.675) v1(36.85,34.1) v1(37.375,34.1) v1(37.375,33.675) v1(36.85,33.675) ; v1(44.45,28.15) v1(44.45,28.575) v1(44.975,28.575) v1(44.975,28.15) v1(44.45,28.15)
VR_PA: C13.1 C21.2 DA1.25 L2.1 | length 6.2
  Top Layer w0.25: L2.1 33.258,48.708 ccw(c34.667,47.3) C13.1 C21.2 32.8,46.09 cw(c32.675,45.315) 32.854,46.079 cw(c32.796,45.836) 32.947,46.036 33.433,45.67 ccw(c33.584,45.87) 33.519,45.628 cw(c33.35,44.975) 33.768,45.505 34.167,45.193 cw(c34,44.975) 34.246,45.099 34.475,44.649 DA1.25
pads on no net: DA1.1 DA1.20 DA1.27 DA1.28 DA2.8 DD1.2 DD1.11 DD1.14 DD1.15 DD1.16 DD1.17 DD1.23 DD1.24 DD1.25 DD1.26 DD1.27 DD1.28 DD1.33 DD1.35 DD1.36 DD1.37 DD1.38 DD1.39 DD1.41 DD1.44 DD1.45 DD1.50 DD1.54 DD1.55 DD1.56 DD1.57
copper on no net: | length 0.1
  Top Layer w0.5: 40.307,42.693 40.354,42.693 40.347,42.7

## Polygon pours and split planes (outlines as drawn)
VCC3V3 on VCC "VCC3V3_L03_P010" (solid, pour order 10): 38.75,62.6 40.95,62.4 42.55,62.1 44.05,61.8 45.05,61.5 46.25,61.1 47.65,60.5 48.95,59.9 50.95,58.8 52.35,57.9 54.35,56.3 56.25,54.4 57.75,52.5 58.95,50.8 59.85,49.2 60.55,47.8 61.05,46.4 61.65,44.8 61.95,43.7 62.25,42.1 62.55,40.3 62.65,38.8 62.65,36.9 62.55,35.1 62.35,33.4 62.05,31.9 61.55,30.3 60.85,28.3 59.95,26.3 58.75,24.2 57.55,22.4 56.25,20.9 54.35,19 52.25,17.3 49.75,15.7 47.35,14.6 45.25,13.8 42.95,13.2 40.55,12.8 38.55,12.6 36.65,12.7 34.15,12.9 31.45,13.4 29.75,13.9 28.25,14.5 25.85,15.6 24.35,16.5 23.25,17.2 21.55,18.5 20.15,19.8 18.45,21.6 16.95,23.6 15.85,25.4 15.05,26.9 13.95,29.7 13.45,31.4 13.05,33.2 12.85,34.4 12.65,36.7 12.65,38.6 13.05,42.1 13.45,43.8 13.95,45.7 14.55,47.1 14.95,48.2 15.65,49.4 16.35,50.6 17.45,52.4 18.95,54.2 20.65,55.9 22.75,57.7 24.95,59.2 26.65,60.1 28.75,61 30.45,61.6 32.55,62.1 34.55,62.4 36.45,62.6
GND on Bottom Layer "GND_L04_P006" (solid, pour order 6): 38.75,62.6 40.95,62.4 42.55,62.1 44.05,61.8 45.05,61.5 46.25,61.1 47.65,60.5 48.95,59.9 50.95,58.8 52.35,57.9 54.35,56.3 56.25,54.4 57.75,52.5 58.95,50.8 59.85,49.2 60.55,47.8 61.05,46.4 61.65,44.8 61.95,43.7 62.25,42.1 62.55,40.3 62.65,38.8 62.65,36.9 62.55,35.1 62.35,33.4 62.05,31.9 61.55,30.3 60.85,28.3 59.95,26.3 58.75,24.2 57.55,22.4 56.25,20.9 54.35,19 52.25,17.3 49.75,15.7 47.35,14.6 45.25,13.8 42.95,13.2 40.55,12.8 38.55,12.6 36.65,12.7 34.15,12.9 31.45,13.4 29.75,13.9 28.25,14.5 25.85,15.6 24.35,16.5 23.25,17.2 21.55,18.5 20.15,19.8 18.45,21.6 16.95,23.6 15.85,25.4 15.05,26.9 13.95,29.7 13.45,31.4 13.05,33.2 12.85,34.4 12.65,36.7 12.65,38.6 13.05,42.1 13.45,43.8 13.95,45.7 14.55,47.1 14.95,48.2 15.65,49.4 16.35,50.6 17.45,52.4 18.95,54.2 20.65,55.9 22.75,57.7 24.95,59.2 26.65,60.1 28.75,61 30.45,61.6 32.55,62.1 34.55,62.4 36.45,62.6
GND on Top Layer "GND_L01_P008" (solid, pour order 8): 38.75,62.6 40.95,62.4 42.55,62.1 44.05,61.8 45.05,61.5 46.25,61.1 47.65,60.5 48.95,59.9 50.95,58.8 52.35,57.9 54.35,56.3 56.25,54.4 57.75,52.5 58.95,50.8 59.85,49.2 60.55,47.8 61.05,46.4 61.65,44.8 61.95,43.7 62.25,42.1 62.55,40.3 62.65,38.8 62.65,36.9 62.55,35.1 62.35,33.4 62.05,31.9 61.55,30.3 60.85,28.3 59.95,26.3 58.75,24.2 57.55,22.4 56.25,20.9 54.35,19 52.25,17.3 49.75,15.7 47.35,14.6 45.25,13.8 42.95,13.2 40.55,12.8 38.55,12.6 36.65,12.7 34.15,12.9 31.45,13.4 29.75,13.9 28.25,14.5 25.85,15.6 24.35,16.5 23.25,17.2 21.55,18.5 20.15,19.8 18.45,21.6 16.95,23.6 15.85,25.4 15.05,26.9 13.95,29.7 13.45,31.4 13.05,33.2 12.85,34.4 12.65,36.7 12.65,38.6 13.05,42.1 13.45,43.8 13.95,45.7 14.55,47.1 14.95,48.2 15.65,49.4 16.35,50.6 17.45,52.4 18.95,54.2 20.65,55.9 22.75,57.7 24.95,59.2 26.65,60.1 28.75,61 30.45,61.6 32.55,62.1 34.55,62.4 36.45,62.6
GND on GND "GND_L02_P009" (solid, pour order 9): 38.75,62.6 40.95,62.4 42.55,62.1 44.05,61.8 45.05,61.5 46.25,61.1 47.65,60.5 48.95,59.9 50.95,58.8 52.35,57.9 54.35,56.3 56.25,54.4 57.75,52.5 58.95,50.8 59.85,49.2 60.55,47.8 61.05,46.4 61.65,44.8 61.95,43.7 62.25,42.1 62.55,40.3 62.65,38.8 62.65,36.9 62.55,35.1 62.35,33.4 62.05,31.9 61.55,30.3 60.85,28.3 59.95,26.3 58.75,24.2 57.55,22.4 56.25,20.9 54.35,19 52.25,17.3 49.75,15.7 47.35,14.6 45.25,13.8 42.95,13.2 40.55,12.8 38.55,12.6 36.65,12.7 34.15,12.9 31.45,13.4 29.75,13.9 28.25,14.5 25.85,15.6 24.35,16.5 23.25,17.2 21.55,18.5 20.15,19.8 18.45,21.6 16.95,23.6 15.85,25.4 15.05,26.9 13.95,29.7 13.45,31.4 13.05,33.2 12.85,34.4 12.65,36.7 12.65,38.6 13.05,42.1 13.45,43.8 13.95,45.7 14.55,47.1 14.95,48.2 15.65,49.4 16.35,50.6 17.45,52.4 18.95,54.2 20.65,55.9 22.75,57.7 24.95,59.2 26.65,60.1 28.75,61 30.45,61.6 32.55,62.1 34.55,62.4 36.45,62.6

## Silkscreen, mask and mechanical layers (free items; w line width, h text height)
Top Overlay:
  circle w0.2: c48.527,19.817 r0.1
  circle w0.2: c30.968,44.178 r0.1
  circle w0.2: c25.425,30.45 r0.1
  circle w0.2: c57.805,37.609 r0.1
  circle w0.2: c57.8,36.8 r0.1
Mechanical 1:
  circle w0.254: c37.627,37.627 r25